# Altium PCB BBB_Board_NEW.PcbDoc (part 3 of 4)
Units mil, origin at the board's own origin, x right, y up, seen from the top; angles counter-clockwise.
Board outline 11000 x 5000 mil, 2 copper layers (Top Layer, Bottom Layer); 103 components, 383 nets, 1066 pads, 514 vias.
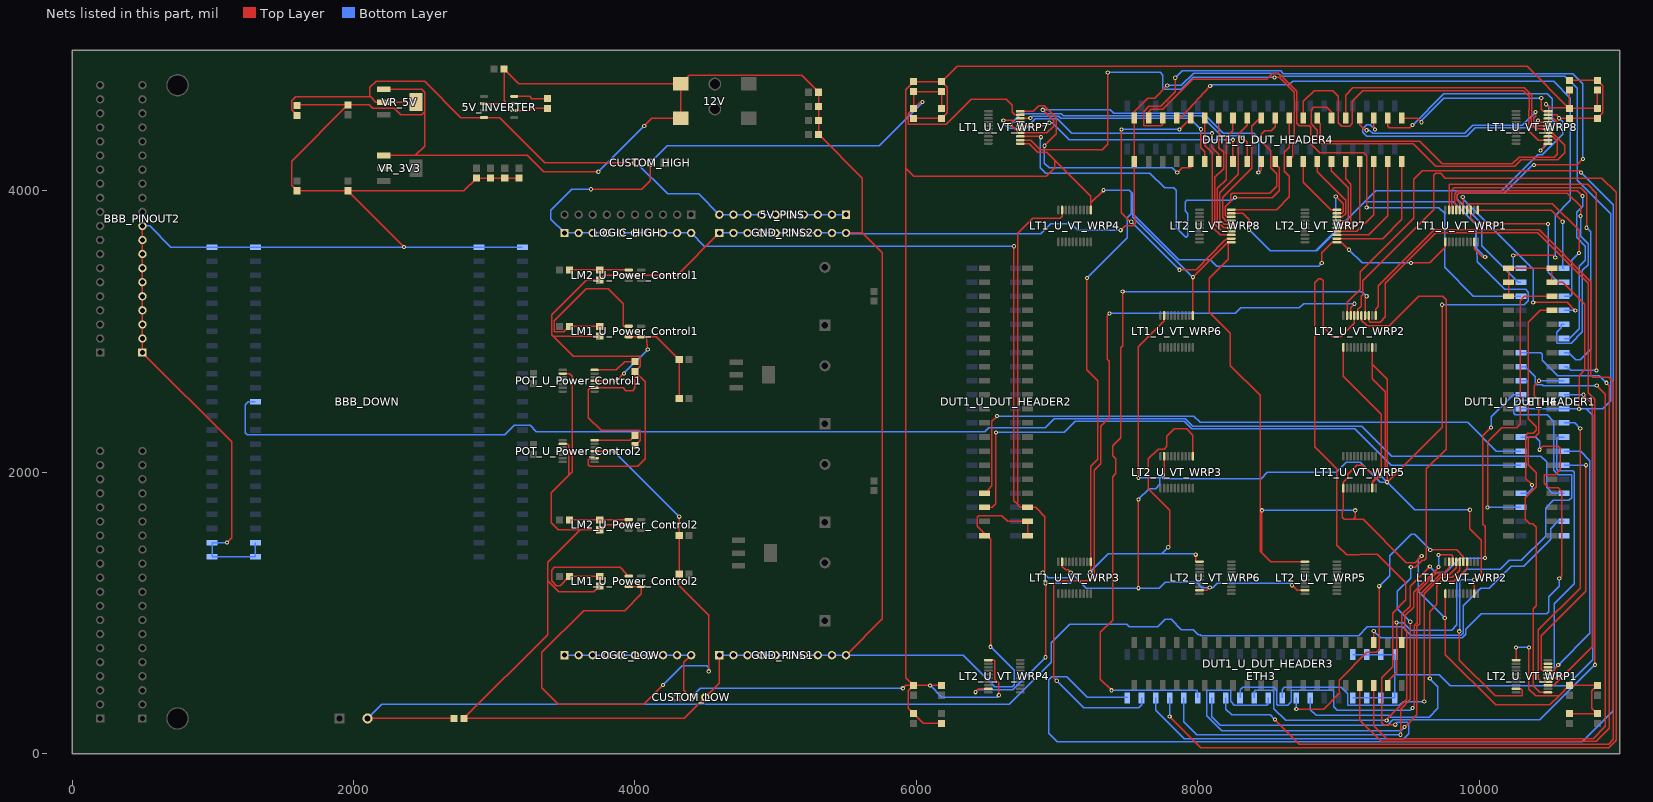
[diagram p3: the nets of this part, all layers, seen from the top]

## Via types
v1: diameter 30, hole 15, Top Layer to Bottom Layer, 514 vias

## Nets (pads, with @x,y where several pads share a name; then routed paths per layer and width w, separated by ;. In a path a pad name is that pad's centre, name@x,y a point inside that pad or via, vN(x,y) a via of type N, cw(c..) or ccw(c..) an arc to the next point about the centre after c; other vN are vias at no path point) (continued)
FPGA_SIG98: ETH3.27 LT1_U_VT_WRP2.4 | length 2265.4
  Top Layer w10: v1(9649,533) 9649,1010 9699,1060 9699,1191.96 9730.61,1223.57 9818.96,1223.57 9913.39,1318 LT1_U_VT_WRP2.4@9913.39,1363.19
  Bottom Layer w10: ETH3.27@8800,396.46 8800,313 8841,272 9357.82,272 9371.82,258 9643,258 9706,321 9706,476 v1(9649,533)
FPGA_SIG99: ETH3.28 LT1_U_VT_WRP2.5 | length 2286.5
  Top Layer w10: v1(8700,317) 8894,317 9006,429 9006,523 9202,719 9268,719 9289,740 v1(9289,1190) ; v1(9652,1448) 9840,1448 9887.8,1400.2 LT1_U_VT_WRP2.5@9887.8,1363.19
  Bottom Layer w10: v1(8700,317) ETH3.28@8700,396.46 ; v1(9289,1190) 9364,1265 9364,1405.87 9518.13,1560 9540,1560 v1(9652,1448)
FPGA_SIG100: ETH3.29 LT1_U_VT_WRP2.6 | length 2332.1
  Top Layer w10: v1(9609,370) 9609,1134.93 9726.07,1252 9809.93,1252 9862.2,1304.27 LT1_U_VT_WRP2.6@9862.2,1363.19
  Bottom Layer w10: ETH3.29@8600,396.46 8600,455 8616,471 9021,471 9067,425 9067,344.08 9433,344.08 9458.92,370 v1(9609,370)
FPGA_SIG101: ETH3.30 LT1_U_VT_WRP2.7 | length 3574.5
  Top Layer w10: v1(9469,189) 9557,277 9557,903.5 9576,922.5 9576,1127.38 9718.92,1270.3 9786.91,1270.3 9836.61,1320 LT1_U_VT_WRP2.7@9836.61,1363.19
  Bottom Layer w10: ETH3.30@8500,396.46 8500,354 8490,344 8260,344 8233,371 8233,449 8067,449 8065,447 8065,268.5 8170,163.5 9443.5,163.5 v1(9469,189)
FPGA_SIG102: ETH3.31 LT1_U_VT_WRP2.8 | length 2630.6
  Top Layer w10: v1(9342,236) 9342,245 9484,387 9484,866 9471,879 9471,979 9534,1042 9534,1148.62 v1(9711,1325.62) ; v1(9711,1412) 9800,1412 9811.02,1400.98 LT1_U_VT_WRP2.8@9811.02,1363.19
  Bottom Layer w10: ETH3.31@8400,396.46 8400,440 8410,450 8531,450 8541,440 8541,320 8625,236 v1(9342,236) ; v1(9711,1325.62) v1(9711,1412)
FPGA_SIG103: ETH3.32 LT1_U_VT_WRP2.9 | length 2800.7
  Top Layer w10: v1(9526.08,324) 9537,334.92 9537,909 9558,930 9558,1147.17 9699.13,1288.3 9753.73,1288.3 9785.43,1320 LT1_U_VT_WRP2.9@9785.43,1363.19
  Bottom Layer w10: ETH3.32@8300,396.46 8300,453 8318,471 8540,471 8561,450 8561,350 8568,343 8639,343 8665,369 8665,447 8668,450 8960,450 8966,444 8966,333 8990.92,308.08 9510.17,308.08 v1(9526.08,324)
FPGA_SIG104: ETH3.33 LT2_U_VT_WRP2.1 | length 8382
  Top Layer w10: v1(8548,242) 8722,68 10919,68 10954,103 10954,2641 10920,2675 10809,2675 10794,2690 10794,3354 10425.5,3722.5 9680.53,3722.5 9284,3325.97 9284,3178 9265.16,3159.16 LT2_U_VT_WRP2.1@9265.16,3113.19
  Bottom Layer w10: ETH3.33@8200,396.46 8200,315 8240,275 8515,275 v1(8548,242)
FPGA_SIG105: ETH3.34 LT2_U_VT_WRP2.3 | length 7939.3
  Top Layer w10: LT2_U_VT_WRP2.3@9213.98,3113.19 9213.98,3080 9226.98,3067 9295,3067 9331,3103 9331,3341.69 9691.28,3701.97 10414.44,3701.97 10775,3341.41 10775,2566 10822,2519 v1(10822,631)
  Bottom Layer w10: ETH3.34@8100,396.46 8100,263 8160,203 9350.27,203 9387.08,239.82 10430.82,239.82 v1(10822,631)
FPGA_SIG106: ETH3.35 LT2_U_VT_WRP2.4 | length 5503.7
  Top Layer w10: v1(7387,450) 7307,530 7307,862 7394,949 7394,1969 7416,1991 7416,2097 7395,2118 7395,2187 7452,2244 7452,2884 7466,2898 v1(7466,3284) ; LT2_U_VT_WRP2.4@9188.39,3113.19 9188.39,3238.39 v1(9200,3250)
  Bottom Layer w10: v1(7387,450) 7997,450 ETH3.35@8000,396.46 ; v1(7466,3284) 9166,3284 v1(9200,3250)
FPGA_SIG107: ETH3.36 LT2_U_VT_WRP2.5 | length 5824.7
  Top Layer w10: LT2_U_VT_WRP2.5@9162.8,3113.19 9162.8,3080 9202.8,3040 9361,3040 9570,3249 9740,3249 9764,3225 9764,2164 9623,2023 9623,1388 9610,1375 9596,1375 9547,1326 v1(9514,1326) ; v1(9441,134) 9441,316.97 9510,385.97 v1(9510,937)
  Bottom Layer w10: ETH3.36@7900,396.46 7900,226 7992,134 v1(9441,134) ; v1(9510,937) 9419,1028 9419,1153 9514,1248 v1(9514,1326)
FPGA_SIG108: ETH3.37 LT2_U_VT_WRP2.6 | length 9887.8
  Top Layer w10: v1(7800,263) 8020,43 10920,43 10972,95 10972,3988 10872,4088 9760,4088 9725,4123 9690,4123 9677,4110 9677,3866 9172,3361 9172,3260.43 9160.14,3248.57 9160.14,3179.93 9137.2,3157 LT2_U_VT_WRP2.6@9137.2,3113.19
  Bottom Layer w10: v1(7800,263) ETH3.37@7800,396.46
FPGA_SIG109: ETH3.38 LT2_U_VT_WRP2.7 | length 6614.6
  Top Layer w10: LT2_U_VT_WRP2.7@9111.61,3113.19 9111.61,3057.61 9016,2962 8960,2962 8890,3032 8890,3359 8873,3376 8860,3376 8832,3348 8832,2182 8988,2026 8988,1482 9058,1412 9148,1412 9154,1418 9276.73,1418 9479,1215.73 9479,1092 9384,997 9384,616 9307,539 9307,220 9321,206 v1(9403,206)
  Bottom Layer w10: ETH3.38@7700,396.46 7700,310 7904,106 9463,106 9498,141 9498,211 9487.18,221.82 9418.82,221.82 v1(9403,206)
FPGA_SIG110: ETH3.39 LT2_U_VT_WRP2.8 | length 5531.5
  Top Layer w10: v1(6998,518) 6978,538 6978,1206 7000,1228 7228,1228 7264,1264 7264,2013.66 7309,2058.66 7309,2325 7371,2387 7371,2787 7357,2801 7357,3113 v1(7372,3128) ; LT2_U_VT_WRP2.8@9086.02,3113.19 9086.02,3170.02 v1(9113,3197)
  Bottom Layer w10: v1(6998,518) 7190,326 7580,326 7600,346 ETH3.39@7600,396.46 ; v1(7372,3128) 8265,3128 8304,3167 8722,3167 8752,3197 v1(9113,3197)
FPGA_SIG111: ETH3.40 LT2_U_VT_WRP2.9 | length 11447.5
  Top Layer w10: LT2_U_VT_WRP2.9@9060.43,3113.19 9060.43,3206.43 9153,3299 9153,3423 9533,3803 9533,4080 9594,4141 10712,4141 v1(10724,4129)
  Bottom Layer w10: ETH3.40@7500,396.46 7500,402 7214,402 7069,547 6961,547 6940,526 6940,144 7000,84 10732,84 10952,304 10952,3901 v1(10724,4129)
FPGA_SIG112: ETH4.1 LT1_U_VT_WRP1.1 | length 978
  Top Layer w10: LT1_U_VT_WRP1.1@9990.16,3863.19 9990.16,3863 10510,3863 v1(10593,3780)
  Bottom Layer w10: v1(10593,3780) 10593,3450 ETH4.1@10603.54,3450
FPGA_SIG113: ETH4.2 LT1_U_VT_WRP1.3 | length 1112.6
  Top Layer w10: LT1_U_VT_WRP1.3@9938.98,3863.19 9938.98,3804.27 9979.25,3764 v1(10489,3764)
  Bottom Layer w10: v1(10489,3764) 10489,3421 10560,3350 ETH4.2@10603.54,3350
FPGA_SIG114: ETH4.3 LT1_U_VT_WRP1.4 | length 1456
  Top Layer w10: LT1_U_VT_WRP1.4@9913.39,3863.19 9913.39,3908 10519.63,3908 10709,3718.63 v1(10709,3558)
  Bottom Layer w10: ETH4.3@10603.54,3250 10646,3250 10657,3261 10657,3506 v1(10709,3558)
FPGA_SIG115: ETH4.4 LT1_U_VT_WRP1.5 | length 1453.5
  Top Layer w10: v1(9882.86,3955) 9887.8,3950.07 LT1_U_VT_WRP1.5@9887.8,3863.19 ; v1(10383,3206) 10626,3206 v1(10683,3149)
  Bottom Layer w10: v1(9882.86,3955) 9882.86,3943.14 10383,3443 v1(10383,3206) ; ETH4.4@10603.54,3150 10682,3150 v1(10683,3149)
FPGA_SIG116: ETH4.5 LT1_U_VT_WRP1.6 | length 2346.9
  Top Layer w10: LT1_U_VT_WRP1.6@9862.2,3863.19 9862.2,3914.8 9843,3934 9843,3970 9856,3983 10626,3983 10720,3889 v1(10720,3821)
  Bottom Layer w10: ETH4.5@10603.54,3050 10584,3050 10584,3027 10551,2994 10551,2917.31 10652.31,2917.31 10733.1,2998.1 10733.1,3434.1 10773,3474 10773,3622 10720,3675 v1(10720,3821)
FPGA_SIG117: ETH4.6 LT1_U_VT_WRP1.7 | length 2195.6
  Top Layer w10: LT1_U_VT_WRP1.7@9836.61,3863.19 9836.61,3897.39 9825,3909 9825,3980 9846,4001 10695,4001 v1(10734,3962)
  Bottom Layer w10: ETH4.6@10603.54,2950 10641,2950 10712,3021 10712,3464 10755,3507 10755,3607.04 10692,3670.04 10692,3849 10734,3891 v1(10734,3962)
FPGA_SIG118: ETH4.7 LT1_U_VT_WRP1.8 | length 2479.8
  Top Layer w10: LT1_U_VT_WRP1.8@9811.02,3863.19 9806,3896.02 9806,4005 9821,4020 10722,4020 10763,3979 v1(10763,3737)
  Bottom Layer w10: ETH4.7@10603.54,2850 10637,2850 10687,2800 10719,2800 10792,2873 10792,3708 v1(10763,3737)
FPGA_SIG119: ETH4.8 LT1_U_VT_WRP1.9 | length 2753.1
  Top Layer w10: LT1_U_VT_WRP1.9@9785.43,3863.19 9785.43,4041.27 9789,4044.84 10770.74,4044.84 10833,3982.58 v1(10833,2723)
  Bottom Layer w10: ETH4.8@10603.54,2750 10623,2750 10650,2723 v1(10833,2723)
FPGA_SIG120: ETH4.9 LT2_U_VT_WRP1.1 | length 2658.6
  Top Layer w10: v1(10425,2650) 10390.67,2615.67 10390.67,2544 10422,2512.67 10422,2275.17 10397.83,2251 10360,2251 10348,2239 10348,2051.68 10404,1995.68 10404,1896 10328,1820 10328,1664.11 10360,1632.11 10380,1632.11 10403.83,1608.28 10403.83,1050.01 10382,1028.18 10382,482.89 10430.05,434.84 LT2_U_VT_WRP1.1@10488.19,434.84
  Bottom Layer w10: v1(10425,2650) ETH4.9@10603.54,2650
FPGA_SIG121: ETH4.10 LT2_U_VT_WRP1.3 | length 2381.4
  Top Layer w10: LT2_U_VT_WRP1.3@10488.19,486.02 10530.02,486.02 10803,759 10803,2487 v1(10740,2550)
  Bottom Layer w10: ETH4.10@10603.54,2550 v1(10740,2550)
FPGA_SIG122: ETH4.12 LT2_U_VT_WRP1.4 | length 2109.3
  Top Layer w10: LT2_U_VT_WRP1.4@10488.19,511.61 10440,511.61 10420,531.61 10420,879 10718,1177 v1(10718,2310)
  Bottom Layer w10: ETH4.12@10603.54,2350 10678,2350 v1(10718,2310)
FPGA_SIG123: ETH4.13 LT2_U_VT_WRP1.5 | length 2006.5
  Top Layer w10: LT2_U_VT_WRP1.5@10488.19,537.2 10541.2,537.2 v1(10561,557)
  Bottom Layer w10: v1(10561,557) 10532,586 10532,1065.71 10675,1208.71 10675,1999 10664,2010 10560,2010 10549,2021 10549,2239 10560,2250 ETH4.13@10603.54,2250
FPGA_SIG124: ETH4.14 LT2_U_VT_WRP1.6 | length 1873.8
  Top Layer w10: LT2_U_VT_WRP1.6@10488.19,562.8 10520,562.8 10536,578.8 10536,604 v1(10561,629)
  Bottom Layer w10: v1(10561,629) 10787,855 10787,2083 10720,2150 ETH4.14@10603.54,2150
FPGA_SIG125: ETH4.15 LT2_U_VT_WRP1.7 | length 1785.8
  Top Layer w10: LT2_U_VT_WRP1.7@10488.19,588.39 10454.61,588.39 10442,601 10442,839 10758,1155 v1(10758,2050)
  Bottom Layer w10: ETH4.15@10603.54,2050 v1(10758,2050)
FPGA_SIG126: LT2_U_VT_WRP1.8
FPGA_SIG127: LT2_U_VT_WRP1.9
FPGA_STCP: DUT1_U_DUT_HEADER3.23 ETH4.28 | length 3192.7
  Top Layer w10: DUT1_U_DUT_HEADER3.23@9250,791.04 v1(9250,871) ; v1(10429,2160) 10453,2184 10563,2184 10577,2170 10577,2020 10540,1983 10463.67,1983 10463.67,1920 10494.67,1889 10560,1889 10586.42,1862.58 10586.42,1262.41 v1(10568.42,1244.42)
  Bottom Layer w10: v1(9250,871) 9299,822 9879,822 9905,848 9905,883 10015,993 10480,993 10495,1008 10495,1116.22 10568.42,1189.63 v1(10568.42,1244.42) ; ETH4.28@10296.46,2250 10400,2250 10429,2221 v1(10429,2160)
FPGA_TX: BBB_DOWN.24 ETH4.17 | length 10068.6
  Bottom Layer w10: BBB_DOWN.24@1302.91,2500 1252,2500 1231,2479 1231,2281 1246,2266 3075.31,2266 3142,2332.69 3255.31,2332.69 3300,2288 6487,2288 6514,2315 6916,2315 6981,2380 7911.2,2380 7963.2,2328 9165,2328 9378,2115 10438.45,2115 10478,2075.45 10478,1892 10520,1850 ETH4.17@10603.54,1850
FPGA_~CS1: DUT1_U_DUT_HEADER4.17 ETH4.40 | length 4577.9
  Top Layer w10: DUT1_U_DUT_HEADER4.17@7850,4516.04 7874,4516 7888,4530 v1(8088,4745) ; v1(10242,3540) 10525,3540 v1(10540,3525)
  Bottom Layer w10: v1(8088,4745) 8095,4752 8648,4752 8673,4777 10530,4777 10648,4659 10648,3932 10540,3824 v1(10540,3525) ; v1(10242,3540) 10242,3460 ETH4.40@10296.46,3450
FPGA_~CS2: DUT1_U_DUT_HEADER2.17 ETH4.27 | length 4427.7
  Top Layer w10: DUT1_U_DUT_HEADER2.17@6483.96,1850 6511,1850 6511,1876 6537,1902 6537,2362 v1(6574,2399)
  Bottom Layer w10: v1(6574,2399) 7971.8,2399 8015.8,2355 9917.02,2355 10122.02,2150 ETH4.27@10296.46,2150
FPGA_~CS3: DUT1_U_DUT_HEADER1.17 ETH4.24 | length 1572.3
  Top Layer w10: v1(10375,1910) 10330,1955 10330,2259 10346,2275 10382,2275 10403.83,2296.83 10403.83,2324.17 10347,2381 10347,3064 10433,3150 DUT1_U_DUT_HEADER1.17@10516.04,3150
  Bottom Layer w10: ETH4.24@10296.46,1850 10343,1850 10375,1882 v1(10375,1910)
FPGA_~CS4: DUT1_U_DUT_HEADER3.17 ETH4.34 | length 5305.9
  Top Layer w10: DUT1_U_DUT_HEADER3.17@9150,483.96 9150,239 9302,87 10831,87 10925,181 10925,2614 v1(10904,2635)
  Bottom Layer w10: ETH4.34@10296.46,2850 10436.24,2850 10449.12,2837.12 10449.12,2794.88 10558,2686 10853,2686 v1(10904,2635)
FPGA_~MR: DUT1_U_DUT_HEADER3.19 ETH4.32 | length 3751.8
  Top Layer w10: DUT1_U_DUT_HEADER3.19@9350,483.96 9350,515 9412,577 v1(9412,931)
  Bottom Layer w10: v1(9412,931) 9460,931 9514,877 9803,877 9841,915 9841,1239 9911,1309 10149,1309 10213,1373 10298,1373 10471,1546 10471,1744 10527,1800 10636,1800 10656,1820 10656,1983 10561,1983 10529,2015 10529,2360 10482,2407 10257,2407 10244,2420 10244,2480 10274,2510 10339,2510 10349,2520 10349,2640 10339,2650 ETH4.32@10296.46,2650
FPGA_~OE: DUT1_U_DUT_HEADER4.18 ETH4.39 | length 5971.3
  Top Layer w10: DUT1_U_DUT_HEADER4.18@7750,4516.04 7750,4473 7739,4462 7618,4462 7617,4463 7617,4563 7653,4599 7737,4599 7840,4702 v1(7840,4803) ; v1(10389,4184) 10695,4184 v1(10737,4226)
  Bottom Layer w10: v1(7840,4803) 7889,4852 8588.87,4852 8608.87,4832 10665,4832 10737,4760 v1(10737,4226) ; ETH4.39@10296.46,3350 10277,3350 10017.08,3609.92 10017.08,3765.92 9843,3940 9843,3970 9856,3983 10179,3983 10380,4184 v1(10389,4184)
FPGA_~PL: DUT1_U_DUT_HEADER3.21 ETH4.31 | length 2384.9
  Top Layer w10: DUT1_U_DUT_HEADER3.21@9450,791.04 9450,989 9508.68,1047.68 9508.68,1188.68 v1(9649,1329) ; v1(10041,1390) 10041,1614.5 10025.31,1630.19 10025.31,2258.92 v1(10084.39,2318)
  Bottom Layer w10: v1(9649,1329) 9691.67,1286.33 9757.74,1286.33 9861.41,1390 v1(10041,1390) ; v1(10084.39,2318) 10084.39,2394.39 10240,2550 ETH4.31@10296.46,2550
FPGA_~WE1: DUT1_U_DUT_HEADER4.19 ETH4.38 | length 4103.9
  Top Layer w10: DUT1_U_DUT_HEADER4.19@7650,4516.04 7650,4560 7669,4579 7751,4579 7964,4792 8488.87,4792 8529.87,4833 8578,4833 8704,4707 8704,4479 8721,4462 8792.54,4462 8802,4452.54 8802,4333 8866,4269 9180,4269 9200,4249 v1(9200,3881)
  Bottom Layer w10: v1(9200,3881) 9713,3881 9754,3840 9754,3455 9959,3250 ETH4.38@10296.46,3250
FPGA_~WE2: DUT1_U_DUT_HEADER2.18 ETH4.26 | length 4492.8
  Top Layer w10: DUT1_U_DUT_HEADER2.18@6483.96,1750 6540,1750 6565,1775 v1(6565,2283)
  Bottom Layer w10: v1(6565,2283) 7051,2283 7130,2362 7903.75,2362 7956.75,2309 9114,2309 9373,2050 ETH4.26@10296.46,2050
FPGA_~WE3: DUT1_U_DUT_HEADER1.18 ETH4.23 | length 2104.3
  Top Layer w10: v1(10059,1750) 10059,2216 10160,2317 10267,2317 10290,2340 10290,3220 10320,3250 DUT1_U_DUT_HEADER1.18@10516.04,3250
  Bottom Layer w10: v1(10059,1750) ETH4.23@10296.46,1750
FPGA_~WE4: DUT1_U_DUT_HEADER3.18 ETH4.33 | length 5076.3
  Top Layer w10: DUT1_U_DUT_HEADER3.18@9250,483.96 9250,199 9344,105 10809,105 10897,193 10897,2553.82 v1(10834.82,2616)
  Bottom Layer w10: ETH4.33@10296.46,2750 10327,2750 10397,2680 10397,2635 10410,2622 10448,2622 10454,2616 v1(10834.82,2616)
GLOBAL_5V: 5V_INVERTER.8 5V_PINS.1 5V_PINS.2 5V_PINS.3 5V_PINS.4 5V_PINS.5 5V_PINS.6 5V_PINS.7 5V_PINS.8 5V_PINS.9 5V_PINS.10 10uF_0.2 CUSTOM_HIGH.3 VR_5V.2 VR_5V.4 | length 4893.6
  Top Layer w10: 10uF_0.2@1600,4535 1561,4574 1561,4639 1589,4667 2123,4667 ; VR_5V.4@2444.17,4630 VR_5V.2@2215.83,4630 2160,4630 2123,4667 ; CUSTOM_HIGH.3@4010,4200 3358,4200 3038,4520 5V_INVERTER.8@2927.72,4520 2764,4520 2506,4778 2161,4778 2117,4734 2117,4673 2123,4667
  Bottom Layer w10: CUSTOM_HIGH.3@4010,4200 4233,3977 4453,3977 5V_PINS.10@4600,3830 5V_PINS.9@4700,3830 5V_PINS.8@4800,3830 5V_PINS.7@4900,3830 5V_PINS.6@5000,3830 5V_PINS.5@5100,3830 5V_PINS.4@5200,3830 5V_PINS.3@5300,3830 5V_PINS.2@5400,3830 5V_PINS.1@5500,3830
GLOBAL_HIGH_POWER: 0.1uF_4_U_VT_WRP1.1 0.1uF_4_U_VT_WRP2.1 0.1uF_4_U_VT_WRP3.1 0.1uF_4_U_VT_WRP4.1 0.1uF_4_U_VT_WRP5.1 0.1uF_4_U_VT_WRP6.1 0.1uF_4_U_VT_WRP7.1 0.1uF_4_U_VT_WRP8.1 CUSTOM_HIGH.2 DUT1_U_DUT_HEADER2.23 LOGIC_HIGH.1 LOGIC_HIGH.2 LOGIC_HIGH.3 LOGIC_HIGH.4 LOGIC_HIGH.5 LOGIC_HIGH.6 LOGIC_HIGH.7 LOGIC_HIGH.8 LOGIC_HIGH.9 LOGIC_HIGH.10 LT1_U_VT_WRP1.19 LT1_U_VT_WRP2.19 LT1_U_VT_WRP3.19 LT1_U_VT_WRP4.19 LT1_U_VT_WRP5.19 LT1_U_VT_WRP6.19 LT1_U_VT_WRP7.19 LT1_U_VT_WRP8.19 LT2_U_VT_WRP1.19 LT2_U_VT_WRP2.19 LT2_U_VT_WRP3.19 LT2_U_VT_WRP4.19 LT2_U_VT_WRP5.19 LT2_U_VT_WRP6.19 LT2_U_VT_WRP7.19 LT2_U_VT_WRP8.19 | length 34079.2
  Top Layer w10: v1(3688,4011) 4049,4011 4110,4072 CUSTOM_HIGH.2@4110,4200 ; v1(6044,4630) 6026.02,4630 0.1uF_4_U_VT_WRP1.1@5980,4583.98 ; 0.1uF_4_U_VT_WRP3.1@6180,4585 0.1uF_4_U_VT_WRP2.1@6180,4705 0.1uF_4_U_VT_WRP6.1@5980,4705 0.1uF_4_U_VT_WRP1.1@5980,4583.98 ; v1(6420,437) 6443.43,460.43 LT2_U_VT_WRP4.19@6511.81,460.43 ; v1(6693,3606) 6693,1797 6719,1771 ; LT1_U_VT_WRP7.19@6738.19,4539.57 6698.43,4539.57 6680,4558 6680,4609 6640,4649 6389,4649 6213,4473 5944,4473 5942,4475 5942,4545.98 0.1uF_4_U_VT_WRP1.1@5980,4583.98 ; v1(6898,1288) 6913,1303 6913,1421.72 6914,1422.72 6914,1683 6847,1750 DUT1_U_DUT_HEADER2.23@6791.04,1750 6740,1750 6719,1771 ; v1(6918,685) v1(6918,1210) ; LT1_U_VT_WRP3.19@7035.43,1363.19 7035.43,1329.57 7060,1305 7080,1305 v1(7097,1288) ; LT1_U_VT_WRP4.19@7035.43,3863.19 7035.43,3820 7021.43,3806 6826.25,3806 6719,3698.75 6719,1771 ; v1(7578,1176) v1(7578,1806) ; v1(7578,1960) 7578,2893 7760.43,3075.43 LT1_U_VT_WRP6.19@7760.43,3113.19 ; v1(7751,1979) 7760.43,1988.43 LT2_U_VT_WRP3.19@7760.43,2113.19 ; LT2_U_VT_WRP6.19@8011.81,1160.43 8065,1160.43 v1(8085,1180.43) ; LT2_U_VT_WRP8.19@8238.19,3839.57 8320,3839.57 8364,3795.57 v1(8364,3723) ; v1(8669.48,1196.52) 8705.57,1160.43 LT2_U_VT_WRP5.19@8761.81,1160.43 ; v1(8980,3960) 9033,3907 9033,3850 9022.57,3839.57 LT2_U_VT_WRP7.19@8988.19,3839.57 ; LT2_U_VT_WRP2.19@9239.57,2886.81 9239.57,2765.43 ; v1(9295,1979) 9243.78,1927.78 ; v1(9736,3190) 9736,2320 v1(9345,1929) 9345,2660 9239.57,2765.43 ; v1(9858,869) 9858,665 10112,411 10307,411 10307,450 10296.57,460.43 LT2_U_VT_WRP1.19@10261.81,460.43 ; v1(9933,1733) 9933,1598 10013,1518 10013,1272 v1@9964.57,1223.57 ; LT1_U_VT_WRP2.19@9964.57,1136.81 v1@9964.57,1223.57 ; v1(9964.57,1236) v1@9964.57,1223.57 ; LT1_U_VT_WRP1.19@9964.57,3636.81 9964.57,3589.43 10025,3529 v1(10042,3529) ; LT1_U_VT_WRP8.19@10488.19,4539.57 10551,4539.57 v1(10567,4515) 0.1uF_4_U_VT_WRP4.1@10640,4515 0.1uF_4_U_VT_WRP7.1@10840,4515 10879,4554 10879,4746 0.1uF_4_U_VT_WRP5.1@10840,4785 0.1uF_4_U_VT_WRP8.1@10640,4785 ; 9239.57,2765.43 9239.57,2665 9333,2571.57 9333,2025.43 9239.57,1932 9243.78,1927.78 ; 9243.78,1927.78 LT1_U_VT_WRP5.19@9239.57,1886.81 9239.57,1923.57 9243.78,1927.78
  Bottom Layer w10: v1(3688,4011) 3551,4011 3403,3863 3403,3797 LOGIC_HIGH.1@3500,3700 LOGIC_HIGH.2@3600,3700 LOGIC_HIGH.3@3700,3700 LOGIC_HIGH.4@3800,3700 LOGIC_HIGH.5@3900,3700 LOGIC_HIGH.6@4000,3700 LOGIC_HIGH.7@4100,3700 LOGIC_HIGH.8@4200,3700 LOGIC_HIGH.9@4300,3700 LOGIC_HIGH.10@4400,3700 4494,3606 v1(6693,3606) ; CUSTOM_HIGH.2@4110,4200 4231,4321 5735,4321 v1(6044,4630) ; v1(6420,437) 6436.19,453.19 6686.19,453.19 v1(6918,685) ; v1(6898,1288) 6937,1249 7097,1249 ; v1(6918,1210) 7097,1210 7097,1249 ; v1(7578,1806) 7655,1883 7700,1883 7731,1914 7731,1959 7732,1960 ; v1(7578,1960) 7732,1960 ; v1(8364,3723) 8514,3573 8837,3573 ; v1(8669.48,1196.52) 8654,1212 8139,1212 8107.43,1180.43 v1(8085,1180.43) 8028.09,1180.43 7991.52,1217 7767,1217 7726,1176 v1(7578,1176) 7209,1176 v1(7097,1288) 7097,1267 ; v1(8980,3960) 8980,3716 ; v1(9295,1979) v1(9345,1929) ; v1(9736,3190) 10319,3190 10349,3220 10349,3280 10329,3300 10180.46,3300 9985,3495.46 9981.45,3589.55 ; v1(9858,869) 9860,871 9860,1226 9870,1236 v1(9964.57,1236) ; v1(9933,1733) 9541,1733 v1(9345,1929) ; v1(10042,3529) 9981.45,3589.55 ; v1(10567,4515) 10592.01,4489.99 10592.01,4400.83 10448.18,4257 10417.02,4257 10161.02,4001 9265,4001 9185,3921 ; 7097,1249 7088,1258 7097,1267 ; 7097,1249 7097,1267 ; 7732,1960 v1(7751,1979) 7751,1954 8451,1954 8495,1998 8985,1998 9056,2069 9155,2069 9295,1929 v1(9345,1929) ; 8837,3573 8846,3573 8980,3707 8980,3716 ; 8837,3573 8980,3716 ; 8980,3716 9185,3921 ; 9185,3921 9815,3921 9974.99,3761.01 ; 9974.99,3761.01 9974.99,3596.01 9981.45,3589.55 ; 9974.99,3761.01 9981.45,3589.55
GLOBAL_LOW_POWER: 0.1uF_0_U_VT_WRP1.2 0.1uF_0_U_VT_WRP2.2 0.1uF_0_U_VT_WRP3.2 0.1uF_0_U_VT_WRP4.2 0.1uF_0_U_VT_WRP5.2 0.1uF_0_U_VT_WRP6.2 0.1uF_0_U_VT_WRP7.2 0.1uF_0_U_VT_WRP8.2 0.1uF_4_U_VT_WRP1.2 0.1uF_4_U_VT_WRP2.2 0.1uF_4_U_VT_WRP3.2 0.1uF_4_U_VT_WRP4.2 0.1uF_4_U_VT_WRP5.2 0.1uF_4_U_VT_WRP6.2 0.1uF_4_U_VT_WRP7.2 0.1uF_4_U_VT_WRP8.2 CUSTOM_LOW.2 LOGIC_LOW.1 LOGIC_LOW.2 LOGIC_LOW.3 LOGIC_LOW.4 LOGIC_LOW.5 LOGIC_LOW.6 LOGIC_LOW.7 LOGIC_LOW.8 LOGIC_LOW.9 LOGIC_LOW.10 LT1_U_VT_WRP1.11 LT1_U_VT_WRP2.11 LT1_U_VT_WRP3.11 LT1_U_VT_WRP4.11 LT1_U_VT_WRP5.11 LT1_U_VT_WRP6.11 LT1_U_VT_WRP7.11 LT1_U_VT_WRP8.11 LT2_U_VT_WRP1.11 LT2_U_VT_WRP2.11 LT2_U_VT_WRP3.11 LT2_U_VT_WRP4.11 LT2_U_VT_WRP5.11 LT2_U_VT_WRP6.11 LT2_U_VT_WRP7.11 LT2_U_VT_WRP8.11 | length 36690.5
  Top Layer w10: CUSTOM_LOW.2@4400,400 4348,452 4348,648 LOGIC_LOW.10@4400,700 ; v1(5904,464) 5925,485 0.1uF_0_U_VT_WRP1.2@5980,485 ; 0.1uF_4_U_VT_WRP1.2@5980,4513.98 6079,4513.98 6080.02,4515 0.1uF_4_U_VT_WRP3.2@6180,4515 6219,4554 6219,4736 0.1uF_4_U_VT_WRP2.2@6180,4775 ; 0.1uF_0_U_VT_WRP5.2@6180,215 6050,215 0.1uF_0_U_VT_WRP7.2@5980,285 5941,324 5941,446 0.1uF_0_U_VT_WRP1.2@5980,485 ; 0.1uF_0_U_VT_WRP8.2@6180,485 v1(6097,485) 0.1uF_0_U_VT_WRP1.2@5980,485 ; LT2_U_VT_WRP4.11@6511.81,665.16 6557,665.16 6557,530 6586,501 v1(6586,415) ; LT1_U_VT_WRP7.11@6738.19,4334.84 6803.16,4334.84 6864,4274 6926,4274 6984,4216 ; v1(7212,3380) 7212,2728.57 7289,2651.57 7289,2090.5 7240.16,2041.66 LT1_U_VT_WRP3.11@7240.16,1363.19 7240.16,1296.16 v1(7235,1291) ; LT1_U_VT_WRP4.11@7240.16,3863.19 7240.16,3914.16 ; v1(7330,4004) 7240.16,3914.16 ; v1(7790,1467) 7799,1476 7799,1731 7649,1881 7649,2094 7719,2164 7760,2164 7780,2184 7780,2257 7831,2308 7920,2308 7965.16,2262.84 LT2_U_VT_WRP3.11@7965.16,2113.19 ; LT1_U_VT_WRP6.11@7965.16,3113.19 v1(7965.16,3386) 8214,3634.84 LT2_U_VT_WRP8.11@8216,3634.84 ; v1(7985,1414) 7985,1365.16 LT2_U_VT_WRP6.11@8011.81,1365.16 ; LT2_U_VT_WRP8.11@8238.19,3634.84 LT2_U_VT_WRP8.11@8216,3634.84 ; v1(8456,1729) 8456,1429.16 8520,1365.16 ; LT2_U_VT_WRP5.11@8761.81,1365.16 8520,1365.16 ; v1(8880.77,3487) 8880.77,3560 8955.61,3634.84 LT2_U_VT_WRP7.11@8988.19,3634.84 9020.16,3634.84 v1(9074,3581) ; LT2_U_VT_WRP2.11@9034.84,2886.81 9034.84,2680.32 9303,2412.16 9303,2033.42 9269.58,2000 9221.58,2000 9173.58,2048 9131,2048 9067,1984 9067,1962 9034.84,1929.84 LT1_U_VT_WRP5.11@9034.84,1886.81 9034.84,1730.84 9025,1721 9025,1680 9041,1664 9177,1664 9483,1358 9544,1358 v1(9591,1405) ; 9104,1665 9119,1680 v1(9119,1729) ; v1(9516,3487) 9646.84,3487 9759.84,3600 LT1_U_VT_WRP1.11@9759.84,3636.81 ; v1(9755,964) v1@9759.84,968.84 ; LT1_U_VT_WRP2.11@9759.84,1136.81 v1@9759.84,968.84 ; LT2_U_VT_WRP1.11@10261.81,665.16 10262,665.16 v1(10262,755) ; v1(10353,755) 10353,459 10400,412 10567,412 ; v1(10435,4286) 10458,4309 10458,4334.84 LT1_U_VT_WRP8.11@10488.19,4334.84 ; v1(10474,4615) 10498,4591 0.1uF_4_U_VT_WRP4.2@10634,4591 ; 0.1uF_0_U_VT_WRP6.2@10640,285 0.1uF_0_U_VT_WRP4.2@10840,285 10801,324 10801,446 0.1uF_0_U_VT_WRP3.2@10840,485 0.1uF_0_U_VT_WRP2.2@10640,485 10567,412 ; 0.1uF_4_U_VT_WRP8.2@10640,4715 0.1uF_4_U_VT_WRP4.2@10640,4591 ; 0.1uF_4_U_VT_WRP5.2@10840,4715 0.1uF_4_U_VT_WRP7.2@10840,4585 0.1uF_4_U_VT_WRP4.2@10640,4585 ; 5923,4718 0.1uF_4_U_VT_WRP6.2@5980,4775 0.1uF_4_U_VT_WRP2.2@6180,4775 ; 5923,4718 5923,4161 5923.13,4160.87 ; 5923,4718 5923.13,4160.87 ; 5923.13,4160.87 5924,541 0.1uF_0_U_VT_WRP1.2@5980,485 ; 5923.13,4160.87 5980,4104 6923,4104 6984,4165 6984,4216 ; 0.1uF_4_U_VT_WRP2.2@6180,4775 6290,4885 10340,4885 0.1uF_4_U_VT_WRP4.2@10634,4591 ; 6984,4216 7240.16,3959.84 7240.16,3914.16 ; LT2_U_VT_WRP8.11@8216,3634.84 8216,3515 8080,3379 8080,3138 8230,2988 8230,2758 8442,2546 8442,1440 8516.84,1365.16 8520,1365.16 ; v1@9759.84,968.84 9759.84,704.16 10118,346 10501,346 10567,412 ; 0.1uF_4_U_VT_WRP4.2@10634,4591 0.1uF_4_U_VT_WRP4.2@10640,4585 ; 0.1uF_4_U_VT_WRP4.2@10634,4591 0.1uF_4_U_VT_WRP4.2@10640,4591 ; 0.1uF_4_U_VT_WRP4.2@10640,4585 0.1uF_4_U_VT_WRP4.2@10640,4591
  Bottom Layer w10: LOGIC_LOW.1@3500,700 LOGIC_LOW.2@3600,700 LOGIC_LOW.3@3700,700 LOGIC_LOW.4@3800,700 LOGIC_LOW.5@3900,700 LOGIC_LOW.6@4000,700 LOGIC_LOW.7@4100,700 LOGIC_LOW.8@4200,700 LOGIC_LOW.9@4300,700 LOGIC_LOW.10@4400,700 ; CUSTOM_LOW.2@4400,400 4464,464 v1(5904,464) ; v1(6097,485) 6181,401 6572,401 v1(6586,415) ; v1(7212,3380) 7499,3667 7499,3808 7528,3837 7528,3990 ; v1(7235,1291) 7365,1421 7744,1421 ; v1(7330,4004) 7514,4004 7528,3990 ; v1(7790,1467) 7744,1421 ; v1(7965.16,3386) 7538,3813.16 7538,3836 ; v1(7985,1414) 7978,1421 7744,1421 ; v1(8456,1729) v1(9119,1729) ; v1(8880.77,3487) 8858,3464.23 8134.77,3464.23 8089,3510 7864,3510 7538,3836 ; v1(9074,3581) 9168,3487 v1(9516,3487) ; v1(9591,1405) 9566,1380 9566,1153 v1(9755,964) ; v1(10262,755) v1(10353,755) ; v1(10435,4286) 10493,4344 10493,4602 10480,4615 v1(10474,4615) ; 7528,3990 7538,3980 7538,3836
GND: 0.1uF_4_U_Power_Control1.1 0.1uF_4_U_Power_Control2.1 0.1uF_5_U_Power_Control1.1 0.1uF_5_U_Power_Control2.1 1MOhm_U_Power_Control1.1 1MOhm_U_Power_Control2.1 1uF_3_U_Power_Control1.1 1uF_3_U_Power_Control2.1 5V_INVERTER.3 5V_INVERTER.6 7MOhm_U_Power_Control1.1 7MOhm_U_Power_Control2.1 10uF_0.1 10uF_1.1 10uF_1_U_Power_Control1.1 10uF_1_U_Power_Control2.1 10uF_2_U_Power_Control1.1 10uF_2_U_Power_Control2.1 12V.2 100nF_0.1 100nF_1.1 150uF_1.1 BBB_DOWN.1 BBB_DOWN.2 BBB_DOWN.43 BBB_DOWN.44 BBB_DOWN.45 BBB_DOWN.46 BBB_DOWN.47 BBB_DOWN.48 BBB_PINOUT2.1 BBB_PINOUT2.2 BBB_PINOUT2.3 BBB_PINOUT2.4 BBB_PINOUT2.5 BBB_PINOUT2.6 BBB_PINOUT2.7 BBB_PINOUT2.8 BBB_PINOUT2.9 BBB_PINOUT2.10 CUSTOM_LOW.3 DUT1_U_DUT_HEADER1.19 DUT1_U_DUT_HEADER1.20 DUT1_U_DUT_HEADER1.21 DUT1_U_DUT_HEADER1.22 DUT1_U_DUT_HEADER1.23 DUT1_U_DUT_HEADER2.20 DUT1_U_DUT_HEADER2.21 DUT1_U_DUT_HEADER2.22 DUT1_U_DUT_HEADER4.20 DUT1_U_DUT_HEADER4.21 ETH3.17 ETH3.18 ETH3.19 ETH3.20 ETH3.21 ETH3.22 ETH3.23 ETH3.24 ETH4.11 ETH4.30 GND_PINS1.1 GND_PINS1.2 GND_PINS1.3 GND_PINS1.4 GND_PINS1.5 GND_PINS1.6 GND_PINS1.7 GND_PINS1.8 GND_PINS1.9 GND_PINS1.10 GND_PINS2.1 GND_PINS2.2 GND_PINS2.3 GND_PINS2.4 GND_PINS2.5 GND_PINS2.6 GND_PINS2.7 GND_PINS2.8 GND_PINS2.9 GND_PINS2.10 LM2_U_Power_Control1.2 LM2_U_Power_Control2.2 POT_U_Power_Control1.2 POT_U_Power_Control1.9 POT_U_Power_Control2.2 POT_U_Power_Control2.9 R1.1 VR_3V3.1 VR_5V.1 | length 51698.5
  Top Layer w10: BBB_PINOUT2.10@500,3750 BBB_PINOUT2.9@500,3650 BBB_PINOUT2.8@500,3550 BBB_PINOUT2.7@500,3450 BBB_PINOUT2.6@500,3350 BBB_PINOUT2.5@500,3250 BBB_PINOUT2.4@500,3150 BBB_PINOUT2.3@500,3050 BBB_PINOUT2.2@500,2950 BBB_PINOUT2.1@500,2850 1135,2215 1135,1534 v1(1101,1500) ; 10uF_0.1@1601,4610 100nF_0.1@1960,4610 ; VR_3V3.1@2215.83,4250.55 2440,4250.55 ; VR_5V.1@2215.83,4720.55 2484.45,4720.55 2506,4699 2506,4560 ; v1(2360,3600) 10uF_1.1@1960,4000 ; 5V_INVERTER.6@2927.72,4620 3090,4620 ; 5V_INVERTER.3@3142.28,4620 3090,4620 ; 10uF_1_U_Power_Control2.1@3175,4090 0.1uF_4_U_Power_Control1.1@3075,4090 0.1uF_4_U_Power_Control2.1@2975,4090 10uF_1_U_Power_Control1.1@2875,4090 2785,4000 10uF_1.1@1960,4000 ; POT_U_Power_Control2.9@3486.81,2201.18 3520,2201.18 3531,2190.18 3531,1979 ; POT_U_Power_Control1.9@3486.81,2701.18 3536.82,2701.18 3555,2683 3555,2003 3531,1979 ; POT_U_Power_Control2.2@3713.19,2098.82 3680,2098.82 3669,2087.82 3669,2053 3680,2042 4020,2042 4074,2096 4074,2641 1uF_3_U_Power_Control1.1@4000,2715 ; v1(3740,4135) 3352,4135 3236.45,4250.55 2440,4250.55 ; 1MOhm_U_Power_Control2.1@3750,1190 3709,1149 3460,1149 3379,1230 ; 1MOhm_U_Power_Control1.1@3750,2967 3420,2967 ; LM2_U_Power_Control2.2@3955.71,1625 3784,1625 7MOhm_U_Power_Control2.1@3750,1591 3610,1591 ; 1uF_3_U_Power_Control2.1@4000,2190 4038,2228 4038,2298 3759,2298 3669.68,2387.32 3669.68,2584.76 3683.73,2598.82 POT_U_Power_Control1.2@3713.19,2598.82 3916.18,2598.82 3935,2580 3985,2580 4000,2595 1uF_3_U_Power_Control1.1@4000,2715 ; v1(4066,4461) 4120,4515 12V.2@4325,4515 12V.2@4325,4760 ; GND_PINS1.1@4600,700 4600,500 CUSTOM_LOW.3@4500,400 4350,250 R1.1@2785,250 3379,844 3379,1230 ; GND_PINS2.1@4600,3700 4300,3400 LM2_U_Power_Control1.2@3955.71,3400 3783,3400 7MOhm_U_Power_Control1.1@3750,3367 3658,3367 3409,3118 3409,2978 3420,2967 ; GND_PINS1.10@5500,700 5757,957 5757,3559 5616,3700 ; GND_PINS2.10@5500,3700 5616,3700 ; DUT1_U_DUT_HEADER2.20@6483.96,1550 DUT1_U_DUT_HEADER2.20@6498.9,1550 ; v1(6527,759) 6527,1521.9 DUT1_U_DUT_HEADER2.20@6498.9,1550 ; DUT1_U_DUT_HEADER2.21@6791.04,1550 DUT1_U_DUT_HEADER2.22@6791.04,1650 6650,1650 6608,1692 6443.58,1692 6431.58,1680 6431.58,1617.31 DUT1_U_DUT_HEADER2.20@6498.9,1550 ; v1(7452,3720) 7483.83,3751.83 7540,3751.83 7560,3771.83 7550,3833 DUT1_U_DUT_HEADER4.21@7550,4208.96 DUT1_U_DUT_HEADER4.20@7550,4516.04 7550,4563 7644.46,4657.46 7692.46,4657.46 v1(7783,4748) ; DUT1_U_DUT_HEADER1.23@10208.96,3250 DUT1_U_DUT_HEADER1.22@10208.96,3350 DUT1_U_DUT_HEADER1.21@10208.96,3450 DUT1_U_DUT_HEADER1.20@10516.04,3450 DUT1_U_DUT_HEADER1.19@10516.04,3350 10593.74,3350 10751.5,3192.24 10751.5,2728.5 10710,2687 v1(10710,2450) ; 10uF_1.1@1960,4000 100nF_1.1@1600,4000 1561,4039 1561,4211 100nF_0.1@1960,4610 ; 100nF_0.1@1960,4610 2113,4610 2138,4585 2290,4585 2335,4540 2485,4540 2506,4560 ; 2440,4250.55 2506,4316.55 2506,4560 ; 3090,4620 3070,4640 150uF_1.1@3070,4865 3175,4760 12V.2@4325,4760 ; 3379,1230 3379,1360 3610,1591 ; 3420,2967 3563,2824 4037,2824 4039,2822 4039,2754 1uF_3_U_Power_Control1.1@4000,2715 ; 3531,1979 3406,1854 3406,1641 3456,1591 3610,1591 ; 12V.2@4325,4760 4386,4821 5184,4821 10uF_2_U_Power_Control2.1@5305,4700 0.1uF_5_U_Power_Control2.1@5305,4600 0.1uF_5_U_Power_Control1.1@5305,4500 10uF_2_U_Power_Control1.1@5305,4400 5616,4089 5616,3700
  Bottom Layer w10: BBB_PINOUT2.10@500,3750 553,3750 703,3600 BBB_DOWN.1@995.83,3600 BBB_DOWN.2@1302.91,3600 v1(2360,3600) BBB_DOWN.47@2892.91,3600 BBB_DOWN.48@3200,3600 ; v1(1101,1500) BBB_DOWN.43@995.83,1500 BBB_DOWN.45@995.83,1400 BBB_DOWN.46@1302.91,1400 BBB_DOWN.44@1302.91,1500 ; v1(3740,4135) v1(4066,4461) ; GND_PINS1.1@4600,700 GND_PINS1.2@4700,700 GND_PINS1.3@4800,700 GND_PINS1.4@4900,700 GND_PINS1.5@5000,700 GND_PINS1.6@5100,700 GND_PINS1.7@5200,700 GND_PINS1.8@5300,700 GND_PINS1.9@5400,700 GND_PINS1.10@5500,700 6334,700 6557,477 6682,477 6695,490 6695,591 v1(6527,759) ; GND_PINS2.1@4600,3700 GND_PINS2.2@4700,3700 GND_PINS2.3@4800,3700 GND_PINS2.4@4900,3700 GND_PINS2.5@5000,3700 GND_PINS2.6@5100,3700 GND_PINS2.7@5200,3700 GND_PINS2.8@5300,3700 GND_PINS2.9@5400,3700 GND_PINS2.10@5500,3700 5507,3693 6885,3693 6956.75,3764.75 7102.4,3764.75 7147.15,3720 v1(7452,3720) ; v1(7783,4748) 7883.62,4748 7969.62,4834 8571.87,4834 8591.87,4814 10609,4814 10695,4728 10695,4075 10933,3837 10933,2507 10876,2450 10760,2450 ; ETH3.24@9100,396.46 ETH3.23@9200,396.46 ETH3.22@9300,396.46 ETH3.21@9400,396.46 9400,580 ; ETH3.17@9100,703.54 ETH3.18@9200,703.54 ETH3.19@9300,703.54 ETH3.20@9400,703.54 9400,580 ; ETH4.30@10296.46,2450 ETH4.11@10603.54,2450 v1(10710,2450) 10760,2450 ; 9400,580 9418,562 9716,562 9795,483 10621,483 10805,667 10805,2405 10760,2450
NEG1V25_U_Power_Control1: 1uF_1_U_Power_Control1.1 1uF_2_U_Power_Control1.1 LM1_U_Power_Control1.3 LM1_U_Power_Control1.4 POT_U_Power_Control1.4 | length 1263.3
  Top Layer w10: POT_U_Power_Control1.4@3713.19,2650 3870,2650 v1(3922,2702) ; LM1_U_Power_Control1.3@3955.71,2962.6 LM1_U_Power_Control1.4@4044.29,2962.6 4080,2962.6 ; v1(4091,2871) 4080,2962.6 ; 1uF_1_U_Power_Control1.1@4315,2525 1uF_2_U_Power_Control1.1@4315,2800 4152.4,2962.6 4080,2962.6
  Bottom Layer w10: v1(3922,2702) v1(4091,2871)
NEG1V25_U_Power_Control2: 1uF_1_U_Power_Control2.1 1uF_2_U_Power_Control2.1 LM1_U_Power_Control2.3 LM1_U_Power_Control2.4 POT_U_Power_Control2.4 | length 4638.6
  Top Layer w10: POT_U_Power_Control2.4@3713.19,2150 v1(3849,2150) ; LM1_U_Power_Control2.3@3955,1187.6 LM1_U_Power_Control2.3@3955.71,1187.6 LM1_U_Power_Control2.4@4044.29,1187.6 4044.29,1135.29 3926,1017 3635,1017 3337,719 3337,467 3454,350 4062,350 v1(4200,488) v1@4201,489 ; v1(4315,1684) 1uF_2_U_Power_Control2.1@4315,1550 1uF_1_U_Power_Control2.1@4315,1275 4315,1194 4525,984 v1(4525,585)
  Bottom Layer w10: v1(3849,2150) v1(4315,1684) ; v1(4200,488) 4338,626 4510,626 4525,611 v1(4525,585)
Net1MOhm_U_Power_Control1_2: 1MOhm_U_Power_Control1.2 3MOhm_U_Power_Control1.1 LM1_U_Power_Control1.1 | length 1242.5
  Top Layer w10: 1MOhm_U_Power_Control1.2@3750,3037 3MOhm_U_Power_Control1.1@3535,3037 3496,2998 3428,2998 3427,2999 3427,3075 3655,3303 3810,3303 3915.6,3197.4 3915.6,3037.4 LM1_U_Power_Control1.1@3955.71,3037.4
Net1MOhm_U_Power_Control2_2: 1MOhm_U_Power_Control2.2 3MOhm_U_Power_Control2.1 LM1_U_Power_Control2.1 | length 1051.8
  Top Layer w10: 1MOhm_U_Power_Control2.2@3750,1260 3MOhm_U_Power_Control2.1@3535,1260 3468,1193 3442,1193 3408,1227 3408,1304 3427,1323 3894,1323 3937,1280 3937,1262.4 LM1_U_Power_Control2.1@3955.71,1262.4
Net1uF_3_U_Power_Control1_2: 1uF_3_U_Power_Control1.2 POT_U_Power_Control1.7 | length 310.9
  Top Layer w10: POT_U_Power_Control1.7@3713.19,2726.77 3868.77,2726.77 3927,2785 1uF_3_U_Power_Control1.2@4000,2785
Net1uF_3_U_Power_Control2_2: 1uF_3_U_Power_Control2.2 POT_U_Power_Control2.7 | length 300.6
  Top Layer w10: POT_U_Power_Control2.7@3713.19,2226.77 3966.77,2226.77 1uF_3_U_Power_Control2.2@4000,2260
Net5MOhm_U_Power_Control1_1: 5MOhm_U_Power_Control1.1 7MOhm_U_Power_Control1.2 LM2_U_Power_Control1.1 | length 420.9
  Top Layer w10: 5MOhm_U_Power_Control1.1@3535,3437 7MOhm_U_Power_Control1.2@3750,3437 3852,3437 3852.4,3437.4 LM2_U_Power_Control1.1@3955.71,3437.4
Net5MOhm_U_Power_Control2_1: 5MOhm_U_Power_Control2.1 7MOhm_U_Power_Control2.2 LM2_U_Power_Control2.1 | length 421.3
  Top Layer w10: 5MOhm_U_Power_Control2.1@3535,1661 7MOhm_U_Power_Control2.2@3750,1661 3852,1661 3853.4,1662.4 LM2_U_Power_Control2.1@3955.71,1662.4
Net5V_INVERTER_2: 5V_INVERTER.2 150uF_0.2 | length 243.9
  Top Layer w10: 5V_INVERTER.2@3142.28,4570 3253,4570 3268,4585 150uF_0.2@3380,4585
Net5V_INVERTER_4: 5V_INVERTER.4 150uF_0.1 | length 243.9
  Top Layer w10: 5V_INVERTER.4@3142.28,4670 3253,4670 3268,4655 150uF_0.1@3380,4655
OTHER_W20: ETH4.20
OTHER_W21: ETH4.19 R1.2 S1.2 | length 10098.3
  Top Layer w10: S1.2@2100,250 R1.2@2715,250
  Bottom Layer w10: S1.2@2100,250 2202,352 6660.77,352 6959,650.23 6959,788.2 7088.8,918 7493.58,918 7511.58,900 7716,900 7770,954 7811,954 7883.08,881.92 7966.93,881.92 8002.84,846 8016.69,846 8023.69,839 9144,839 9205,900 9455,900 9515,840 9869,840 9886,857 9886,1052 10010,1176 10069.77,1176 10225.89,1332.12 10315.5,1332.12 10506.47,1523.09 10506.47,1599.79 10556.69,1650 ETH4.19@10603.54,1650
OVCC_B0: DUT1_U_DUT_HEADER4.1 LT1_U_VT_WRP8.20 | length 1213.7
  Top Layer w10: DUT1_U_DUT_HEADER4.1@9450,4516.04 9560,4516 v1(9589,4487) ; v1(10441,4659) 10441,4580 10455.84,4565.16 LT1_U_VT_WRP8.20@10488.19,4565.16
  Bottom Layer w10: v1(9589,4487) 9589,4499 9749,4659 v1(10441,4659)
OVCC_B1: DUT1_U_DUT_HEADER4.2 LT1_U_VT_WRP8.18 | length 1666.1
  Top Layer w10: DUT1_U_DUT_HEADER4.2@9350,4516.04 9350,4457 9359.69,4447.31 9506.31,4447.31 v1(9526,4467) ; LT1_U_VT_WRP8.18@10488.19,4513.98 10526.08,4513.98 10564.01,4476.04 v1(10564.01,4459.99)
  Bottom Layer w10: v1(9526,4467) 9747,4688 10485,4688 10520.17,4652.83 10520.17,4503.83 v1(10564.01,4459.99)
OVCC_B2: DUT1_U_DUT_HEADER4.3 LT1_U_VT_WRP8.17 | length 1602.3
  Top Layer w10: DUT1_U_DUT_HEADER4.3@9250,4516.04 9250,4446 v1(9260,4436) ; v1(10417,4500) 10428.61,4488.39 LT1_U_VT_WRP8.17@10488.19,4488.39
  Bottom Layer w10: v1(9260,4436) 9226,4470 9200,4470 9172,4442 9172,4417 9201,4388 9912,4388 9971.72,4447.72 10364.72,4447.72 v1(10417,4500)
OVCC_B3: DUT1_U_DUT_HEADER4.4 LT1_U_VT_WRP8.16 | length 1573.1
  Top Layer w10: DUT1_U_DUT_HEADER4.4@9150,4516.04 9150,4469 9189,4430 v1(9200,4430) ; v1(10400,4559) 10400,4528.28 10388.85,4517.13 10388.85,4483.15 10409.2,4462.8 LT1_U_VT_WRP8.16@10488.19,4462.8
  Bottom Layer w10: v1(9200,4430) 9220,4430 9242,4408 9896,4408 9953.72,4465.72 10306.72,4465.72 v1(10400,4559)
OVCC_B4: DUT1_U_DUT_HEADER4.5 LT1_U_VT_WRP8.15 | length 1869.1
  Top Layer w10: DUT1_U_DUT_HEADER4.5@9050,4516.04 9050,4680 9101,4731 10320,4731 10372,4679 10372,4537 10370,4535 10370,4472 10400,4442 10443.5,4442 10448.3,4437.2 LT1_U_VT_WRP8.15@10488.19,4437.2
OVCC_B5: DUT1_U_DUT_HEADER4.6 LT1_U_VT_WRP8.14 | length 2529.4
  Top Layer w10: DUT1_U_DUT_HEADER4.6@8950,4516.04 8950,4560 8917,4593 8825,4593 8805,4573 8805,4475 8850,4430 8850,4361 8877,4334 9530,4334 9691,4173 10254,4173 10300,4219 10559,4219 10609,4269 10609,4322.48 10519.87,4411.61 LT1_U_VT_WRP8.14@10488.19,4411.61
OVCC_B6: DUT1_U_DUT_HEADER4.7 LT1_U_VT_WRP8.13 | length 2115.8
  Top Layer w10: DUT1_U_DUT_HEADER4.7@8850,4516.04 8850,4496 8870,4476 8870,4369 8886,4353 9576,4353 9738,4191 10236,4191 10284,4239 10534,4239 10556,4261 10556,4350.02 10520,4386.02 LT1_U_VT_WRP8.13@10488.19,4386.02
OVCC_B7: DUT1_U_DUT_HEADER4.8 LT1_U_VT_WRP8.12 | length 2594.5
  Top Layer w10: DUT1_U_DUT_HEADER4.8@8750,4516.04 8750,4636 8826,4712 8959,4712 8998,4673 8998,4482 9022,4458 9078,4458 9099.31,4479.31 9099.31,4637.31 9172,4710 10314,4710 10354,4670 10354,4575 10351,4572 10351,4428 10418.57,4360.43 LT1_U_VT_WRP8.12@10488.19,4360.43
OVCC_B8: DUT1_U_DUT_HEADER4.9 LT2_U_VT_WRP8.20 | length 1038.6
  Top Layer w10: LT2_U_VT_WRP8.20@8238.19,3865.16 8559.84,3865.16 8650.69,3956 8650.69,4103 8616,4137.69 8616,4275 8650,4309 DUT1_U_DUT_HEADER4.9@8650,4516.04
OVCC_B9: DUT1_U_DUT_HEADER4.10 LT2_U_VT_WRP8.18 | length 1159.6
  Top Layer w10: LT2_U_VT_WRP8.18@8238.19,3813.98 8205,3813.98 8193.69,3825.28 8193.69,3886.91 8233.79,3927 8233.79,3970 8246.32,3982.53 8509.53,3982.53 8560,4033 8560,4120.26 8516.69,4163.57 8516.69,4284.31 8450,4351 8450,4400 8476,4426 8521.66,4426 8550,4454.34 DUT1_U_DUT_HEADER4.10@8550,4516.04
OVCC_B10: DUT1_U_DUT_HEADER4.11 LT2_U_VT_WRP8.17 | length 896.7
  Top Layer w10: LT2_U_VT_WRP8.17@8238.19,3788.39 8197.73,3788.39 8175.69,3810.42 8175.69,3953.73 8383,4161.03 8383,4459 8440.04,4516.04 DUT1_U_DUT_HEADER4.11@8450,4516.04
OVCC_B11: DUT1_U_DUT_HEADER4.12 LT2_U_VT_WRP8.16 | length 896.2
  Top Layer w10: LT2_U_VT_WRP8.16@8238.19,3762.8 8187.01,3762.8 8157.69,3792.12 8157.69,3986.55 8288,4116.85 8288,4402 8350,4464 DUT1_U_DUT_HEADER4.12@8350,4516.04
OVCC_B12: DUT1_U_DUT_HEADER4.13 LT2_U_VT_WRP8.15 | length 897.9
  Top Layer w10: LT2_U_VT_WRP8.15@8238.19,3737.2 8182.65,3737.2 8139.69,3780.17 8139.69,4017.08 8201,4078.39 8201,4376 8250,4425 DUT1_U_DUT_HEADER4.13@8250,4516.04
OVCC_B13: DUT1_U_DUT_HEADER4.14 LT2_U_VT_WRP8.14 | length 930.7
  Top Layer w10: DUT1_U_DUT_HEADER4.14@8150,4516.04 8150,4306 8182.69,4273.31 8182.69,4157 8121,4095.31 8121,3762.86 8172.24,3711.61 LT2_U_VT_WRP8.14@8238.19,3711.61
OVCC_B14: DUT1_U_DUT_HEADER4.15 LT2_U_VT_WRP8.13 | length 954.9
  Top Layer w10: DUT1_U_DUT_HEADER4.15@8050,4516.04 8050,4323 8102,4271 8102,3742.15 8158.13,3686.02 LT2_U_VT_WRP8.13@8238.19,3686.02
OVCC_B15: DUT1_U_DUT_HEADER4.16 LT2_U_VT_WRP8.12 | length 2162.6
  Top Layer w10: v1(7457,4436) 7457,3843 7520,3780 v1(7527,3780) ; v1(7869,3438) 7990,3438 8184,3640 8204.43,3660.43 LT2_U_VT_WRP8.12@8238.19,3660.43 ; v1(7869.96,4436) DUT1_U_DUT_HEADER4.16@7950,4516.04
  Bottom Layer w10: v1(7457,4436) v1(7869.96,4436) ; v1(7527,3780) v1(7869,3438)
OVCC_B16: DUT1_U_DUT_HEADER4.25 LT1_U_VT_WRP7.20 | length 1791.3
  Top Layer w10: LT1_U_VT_WRP7.20@6738.19,4565.16 6832.16,4565.16 6870,4603 6910,4603 6994,4519 6994,4404 v1(6910,4320) ; v1(7854,4129) 7889,4164 7950,4164 DUT1_U_DUT_HEADER4.25@7950,4208.96
  Bottom Layer w10: v1(6910,4320) 6910,4196 6943,4163 7820,4163 v1(7854,4129)
OVCC_B17: DUT1_U_DUT_HEADER4.26 LT1_U_VT_WRP7.18 | length 1567.8
  Top Layer w10: LT1_U_VT_WRP7.18@6738.19,4513.98 6806.98,4513.98 v1(6810,4517) ; v1(8022,4437) 8022,4305.51 8050,4277.51 DUT1_U_DUT_HEADER4.26@8050,4208.96
  Bottom Layer w10: v1(6810,4517) 6822,4529 7011,4529 7025,4515 7944,4515 v1(8022,4437)
OVCC_B18: DUT1_U_DUT_HEADER4.27 LT1_U_VT_WRP7.17 | length 1932.9
  Top Layer w10: v1(6618,4500) 6683.08,4500 6694.69,4488.39 LT1_U_VT_WRP7.17@6738.19,4488.39 ; v1(8100,4408) 8100,4310 8150,4260 DUT1_U_DUT_HEADER4.27@8150,4208.96
  Bottom Layer w10: v1(6618,4500) 6618,4480 6655,4443 6776,4443 6844,4511 6999.85,4511 7102.85,4408 v1(8100,4408)
OVCC_B19: DUT1_U_DUT_HEADER4.28 LT1_U_VT_WRP7.16 | length 1723.3
  Top Layer w10: LT1_U_VT_WRP7.16@6738.19,4462.8 6924.8,4462.8 v1(6945,4483) ; DUT1_U_DUT_HEADER4.28@8250,4208.96 v1(8250,4362)
  Bottom Layer w10: v1(6945,4483) 6965,4483 7086,4362 v1(8250,4362)
OVCC_B20: DUT1_U_DUT_HEADER4.29 LT1_U_VT_WRP7.15 | length 2018.2
  Top Layer w10: v1(6667,4472) 6701.8,4437.2 LT1_U_VT_WRP7.15@6738.19,4437.2 ; v1(8317,4376) 8350,4343 DUT1_U_DUT_HEADER4.29@8350,4208.96
  Bottom Layer w10: v1(6667,4472) 6742,4547 7029,4547 7042.83,4533.17 8023.83,4533.17 8167,4390 8303,4390 v1(8317,4376)
OVCC_B21: DUT1_U_DUT_HEADER4.30 LT1_U_VT_WRP7.14 | length 2357.3
  Top Layer w10: LT1_U_VT_WRP7.14@6738.19,4411.61 6926.61,4411.61 6975,4460 6975,4498 v1(6898,4575) ; v1(8430,4129) 8450,4149 DUT1_U_DUT_HEADER4.30@8450,4208.96
  Bottom Layer w10: v1(6898,4575) 7378.17,4575 7402,4551.17 8038.83,4551.17 8181,4409 8398,4409 8434,4373 8434,4133 v1(8430,4129)
OVCC_B22: DUT1_U_DUT_HEADER4.31 LT1_U_VT_WRP7.13 | length 2951.1
  Top Layer w10: LT1_U_VT_WRP7.13@6738.19,4386.02 6879.98,4386.02 v1(6885,4381) ; v1(8264,3952) 8530,3952 8578,4000 8578,4164 8550,4192 DUT1_U_DUT_HEADER4.31@8550,4208.96
  Bottom Layer w10: v1(6885,4381) 6881,4377 6881,4162 6918,4125 7659,4125 7764,4020 7829,4020 7846,4003 7846,3737 7913,3670 7919,3670 7930,3681 7930,3838 7910,3858 7910,3919 7923,3932 8241,3932 8261,3952 v1(8264,3952)
OVCC_B23: DUT1_U_DUT_HEADER4.32 LT1_U_VT_WRP7.12 | length 3202.7
  Top Layer w10: LT1_U_VT_WRP7.12@6738.19,4360.43 6813.57,4360.43 6882,4292 7320,4292 7360,4332 v1(7360,4841) ; v1(8545,4805) 8580,4805 8686,4699 8686,4345 8673,4332 8673,4239 8650,4239 DUT1_U_DUT_HEADER4.32@8650,4208.96
  Bottom Layer w10: v1(7360,4841) 7732,4841 7752,4821 7752,4730 7762,4720 7882,4720 7967,4805 v1(8545,4805)
OVCC_B24: DUT1_U_DUT_HEADER4.33 LT2_U_VT_WRP7.20 | length 467.8
  Top Layer w10: DUT1_U_DUT_HEADER4.33@8750,4208.96 8750,4060.11 8944.95,3865.16 LT2_U_VT_WRP7.20@8988.19,3865.16
OVCC_B25: DUT1_U_DUT_HEADER4.34 LT2_U_VT_WRP7.18 | length 527.6
  Top Layer w10: DUT1_U_DUT_HEADER4.34@8850,4208.96 8850,4134 9051,3933 9051,3837 9027.98,3813.98 LT2_U_VT_WRP7.18@8988.19,3813.98
OVCC_B26: DUT1_U_DUT_HEADER4.35 LT2_U_VT_WRP7.17 | length 546.2
  Top Layer w10: DUT1_U_DUT_HEADER4.35@8950,4208.96 8950,4141 9069,4022 9069,3796.05 9061.33,3788.39 LT2_U_VT_WRP7.17@8988.19,3788.39
OVCC_B27: DUT1_U_DUT_HEADER4.36 LT2_U_VT_WRP7.16 | length 554.3
  Top Layer w10: LT2_U_VT_WRP7.16@8988.19,3762.8 9075.39,3762.8 9088,3775.41 9088,4047 9050,4085 DUT1_U_DUT_HEADER4.36@9050,4208.96
OVCC_B28: DUT1_U_DUT_HEADER4.37 LT2_U_VT_WRP7.15 | length 609.5
  Top Layer w10: LT2_U_VT_WRP7.15@8988.19,3737.2 9108.95,3737.2 9150,3778.26 DUT1_U_DUT_HEADER4.37@9150,4208.96
OVCC_B29: DUT1_U_DUT_HEADER4.38 LT2_U_VT_WRP7.14 | length 689.2
  Top Layer w10: LT2_U_VT_WRP7.14@8988.19,3711.61 9130.61,3711.61 9250,3831 DUT1_U_DUT_HEADER4.38@9250,4208.96
OVCC_B30: DUT1_U_DUT_HEADER4.39 LT2_U_VT_WRP7.13 | length 805.1
  Top Layer w10: LT2_U_VT_WRP7.13@8988.19,3686.02 9214.02,3686.02 9350,3822 DUT1_U_DUT_HEADER4.39@9350,4208.96
OVCC_B31: DUT1_U_DUT_HEADER4.40 LT2_U_VT_WRP7.12 | length 930.7
  Top Layer w10: LT2_U_VT_WRP7.12@8988.19,3660.43 9314,3660.43 9450,3796.43 DUT1_U_DUT_HEADER4.40@9450,4208.96